# Altium PCB TSAL2_PL.PcbDoc
Units mil, origin at the board's own origin, x right, y up, seen from the top; angles counter-clockwise.
Board outline 3582.68 x 1220.47 mil, 2 copper layers (Top Layer, Bottom Layer); 22 components, 21 nets, 54 pads, 0 vias.
Unrouted connection lines stored in the file: 26.
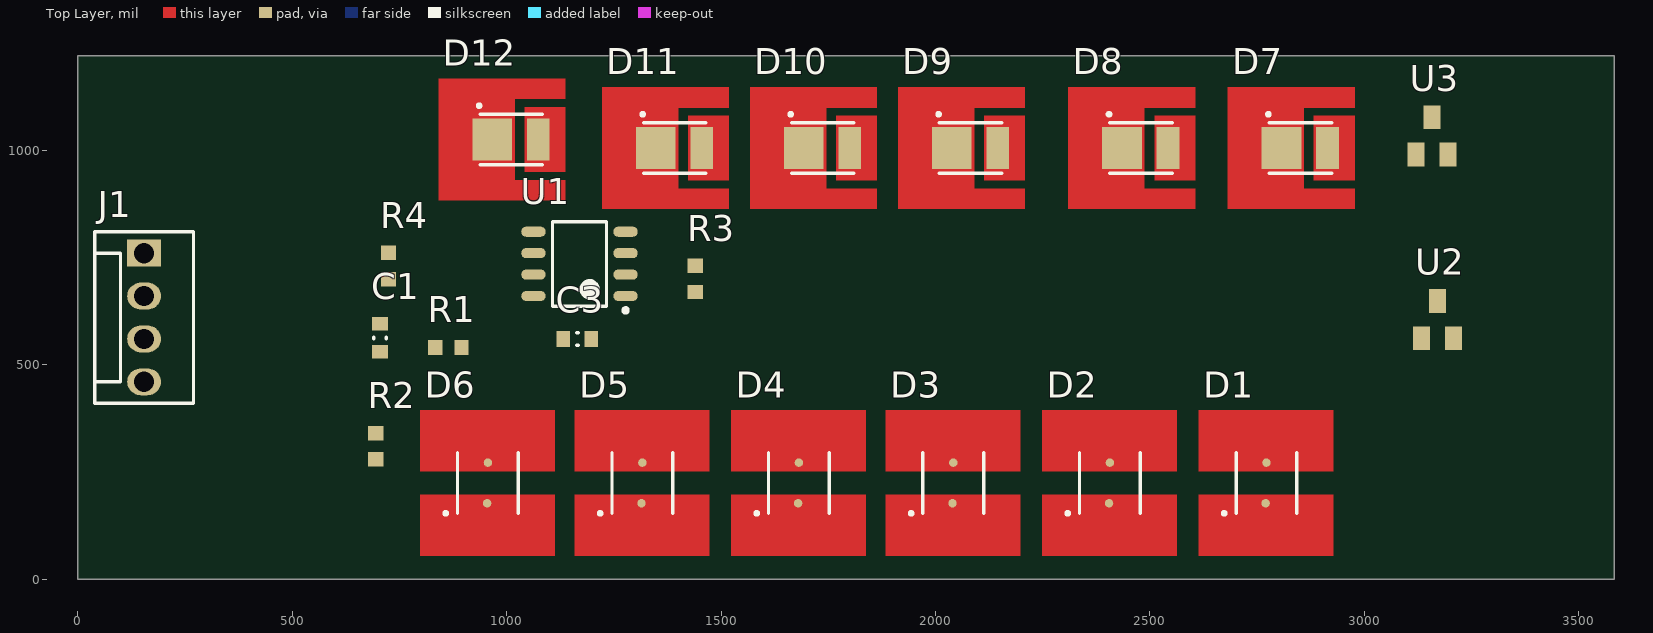
[diagram p0: Top Layer view]
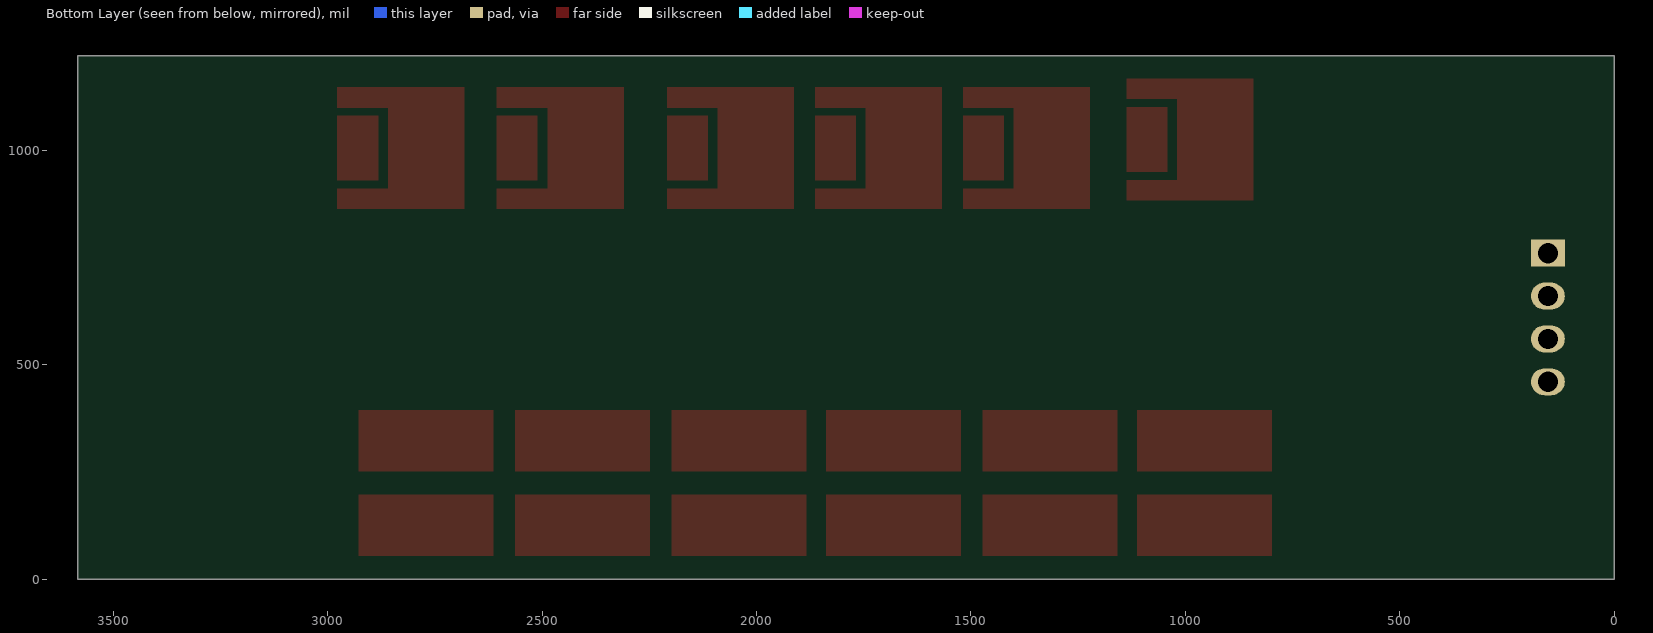
[diagram p1: Bottom Layer view, seen from below]

## Layer stack, top to bottom
Top Solder: solder mask 0.4, Solder Resist, Dk 3.5
Top Layer: signal copper 1.4
Dielectric 1: dielectric 12.6, FR-4, Dk 4.8
Bottom Layer: signal copper 1.4
Bottom Solder: solder mask 0.4, Solder Resist, Dk 3.5

## Board outline
0,0 3582.68,0 3582.68,1220.47 0,1220.47

## Design rules (kind name [scope] priority, off if disabled: settings)
Clearance [All] p1: gap=10 ignorepadtopadclearanceinfootprint=FALSE except(0: Arc-Hole Track-Hole SMDPad-Hole THPad-Hole Via-Hole Fill-Hole Poly-Hole Region-Hole Text-Hole)
PolygonConnect [All] p1: connectstyle=Relief reliefconductorwidth=10 reliefentries=4 polygonreliefangle="90 Angle" airgapwidth=10
RoomDefinition TSAL_PL [InComponentClass('TSAL_PL')] p1: confinementstyle=ConfineIn formatcopy=TRUE lockcomponents=FALSE outline 0,0 2000,0 2000,1000 0,1000
RoutingVias [All] p1: holewidth=28 width=50 viastyle="Through Hole" minholewidth=28 minwidth=50 maxholewidth=28 maxwidth=50
SolderMaskExpansion [All] p1: expansion=4 istentingtop=FALSE
Width [All] p1: maxlimit=10 minlimit=10 preferedwidth=10
30 further rules are at their usual default settings.

## Components (designator, comment, footprint, x,y, rotation, side; value= is the part's Value field where it differs from the comment)
C1 "0603" "0603 CAPACITOR (TDK C-SERIES)" 705,562.52 r90 top
C3 "0603" "0603 CAPACITOR (TDK C-SERIES)" 1165,560 r180 top
D1 "RED" "RED LED" 2771.57,224.29 r180 top
D2 "RED" "RED LED" 2406.57,224.29 r180 top
D3 "RED" "RED LED" 2041.57,224.29 r180 top
D4 "RED" "RED LED" 1681.57,224.29 r180 top
D5 "RED" "RED LED" 1316.57,224.29 r180 top
D6 "RED" "RED LED" 956.57,224.29 r180 top
D7 "GREEN" "GREEN LED" 2815.43,1005 r180 top
D8 "GREEN" "GREEN LED" 2443.86,1005 r180 top
D9 "GREEN" "GREEN LED" 2046.57,1005 r180 top
D10 "GREEN" "GREEN LED" 1701.57,1005 r180 top
D11 "GREEN" "GREEN LED" 1356.57,1005 r180 top
D12 "GREEN" "GREEN LED" 975.43,1025 r180 top
J1 "1x4 Header" HDR1x4 155,610 r0 top
R1 "0603" "0603 RESISTOR (YAGEO)" 864.49,540 r180 top
R2 "0603" "0603 RESISTOR (YAGEO)" 695,310 r90 top
R3 "0603" "0603 RESISTOR (YAGEO)" 1440,700 r90 top
R4 "0603" "0603 RESISTOR (YAGEO)" 725,730 r270 top
U1 "555" SOIC-8 1170,735 r180 top
U2 "2N7002" 2N7002 3170,605 r0 top
U3 "2N7002" 2N7002 3157.6,1033.31 r0 top

## Footprints (in the part's own frame and the unit in brackets; to place one, negate y for a bottom-side part, rotate by r counter-clockwise, add the part's x,y. Pads: shape width x height; smd on the part's side, far side on the other; paste and mask are expansions set on the pad)
2N7002 [mm]
  rect 1x1.4 smd: 1(-0.95,-1.1) 2(0.95,-1.1) 3(0,1.1)
  body extent -1.46,-1.4 1.46,1.4, height 1.16
"0603 CAPACITOR (TDK C-SERIES)" [mm] "Chip Capacitor, 2-Leads, Body 1.60x0.80mm, IPC Medium Density"
  rect 0.8x0.95 smd: 1(-0.825,0) 2(0.825,0)
  silkscreen extent -0.05,-0.38 0.05,0.38, body extent -0.85,-0.45 0.85,0.45, height 0.9
"0603 RESISTOR (YAGEO)" [mm] "Chip Resistor, 2-Leads, Body 1.60x0.80mm, IPC Medium Density"
  rect 0.85x0.9 smd: 1(-0.775,0) 2(0.775,0)
  body extent -0.85,-0.45 0.85,0.45, height 0.55
"GREEN LED" [mm]
  rect 1.35x2.5 smd: 1(-2.5,0)
  rect 2.35x2.5 smd: 2(0.225,0)
  Top Layer region: -4.1,-3.6 -4.1,-2.4 -1.1,-2.4 -1.1,-1.25 -1.1,1.25 -1.1,2.4 -4.1,2.4 -4.1,3.6 3.4,3.6 3.4,-3.6
  Top Layer region: -4.1,-1.9 -1.7,-1.9 -1.7,-1.25 -1.7,1.25 -1.7,1.9 -4.1,1.9
  silkscreen extent -2.75,-2.07 1.07,1.5, body extent -2.65,-1.35 0.85,1.45, height 0.81
HDR1x4 [mm]
  rect 2x1.6 hole 1.2: 1(0,3.81)
  oval 2x1.6 hole 1.2: 2(0,1.27) 3(0,-1.27) 4(0,-3.81)
  silkscreen extent -2.92,-5.08 2.92,5.08, body extent -2.9,-5.08 2.9,5.08, height 11.07
"RED LED" [mm]
  round 0.5 smd: 1(0.05,1.2) 2(0,-1.2)
  Top Layer region: -1.4,0.7 -1.4,1.7 -0.5,1.7 -0.5,2.5 0.5,2.5 0.5,1.7 1.4,1.7 1.4,0.7
  Top Layer region: -1.4,-0.7 -1.4,-1.7 -0.5,-1.7 -0.5,-2.5 0.5,-2.5 0.5,-1.7 1.4,-1.7 1.4,-0.7
  Top Layer region: 4,-0.7 4,-4.3 -3.95,-4.3 -3.95,-0.7
  Top Layer region: 4,0.7 4,4.3 -3.95,4.3 -3.95,0.7
  silkscreen extent -1.8,-1.8 2.57,1.87, body extent -1.8,-1.86 1.7,1.76, height 1.26
SOIC-8 [mm] "SOIC, 8-Leads, Body 4.91x3.90mm, Pitch 1.27mm, IPC Medium Density"
  oval 1.45x0.6 smd: 1(-2.725,1.905) 2(-2.725,0.635) 3(-2.725,-0.635) 4(-2.725,-1.905) 5(2.725,-1.905) 6(2.725,-0.635) 7(2.725,0.635) 8(2.725,1.905)
  silkscreen extent -2.85,-2.5 1.6,2.88, body extent -3,-2.5 3,2.5, height 1.75

## Part data
C1: library part CL10B103KB8NNNC, "Cap Ceramic 0.01uF 50VDC X7R 10% SMD 0603 Paper T/R", Capacitance=10nF, Case Code (Metric)=1608, Dielectric=X7R, Manufacturer=Samsung, Max Operating Temperature=125°C, Min Operating Temperature=-55°C, Package Quantity=1, Supplier Part Number 1=1276-1009-1-ND, Tolerance=10%, Voltage=50V, Case Code (Imperial)=0603, Case/Package=0603, Category="Ceramic Capacitors", ComponentLink1Description=https://datasheet.ciiva.com/15195/getdatasheetpartid-357415-15195721.pdf?src-supplier=Verical, ComponentLink1URL=https://datasheet.ciiva.com/15195/getdatasheetpartid-357415-15195721.pdf?src-supplier=Verical, ComponentLink2Description=https://datasheet.ciiva.com/29198/457455-da-01-en-vs-kondensator-0603-29198644.pdf?src-supplier=Conrad, ComponentLink2URL=https://datasheet.ciiva.com/29198/457455-da-01-en-vs-kondensator-0603-29198644.pdf?src-supplier=Conrad, ComponentLink3Description=https://datasheet.ciiva.com/20173/71-0315-20173334.pdf?src-supplier=Rapid+Electronics, ComponentLink3URL=https://datasheet.ciiva.com/20173/71-0315-20173334.pdf?src-supplier=Rapid+Electronics, Contact Plating=Tin, Depth=0.8mm, Height=0.8mm, Lead Free="Lead Free", Length=1.6mm, Manufacturer Part Number=CL10B103KB8NNNC, Material=Ceramic, Mount="Surface Mount", Packaging="Tape and Reel", Pricing 1="1=0.10000, 10=0.02700, 50=0.01480, 100=0.01210, 500=0.00866, 1000=0.00681 (USD)", Radiation Hardening=No, RoHS=Yes, Stock 1=3003971, Supplier 1=Digi-Key, Thickness=0.035inch, Voltage Rating=50V, Voltage Rating (DC)=50V, Width=0.031inch
C3: library part UMK107ABJ105KAHT, "CAP ,MLCC ,0603,50V ,X5R,1uF 10% ,T&R", Capacitance=1uF, Case Code (Metric)=1608, Dielectric=X5R, Manufacturer="Taiyo Yuden", Max Operating Temperature=85°C, Min Operating Temperature=-55°C, Package Quantity=4000, Ratings=AEC-Q200, Supplier Part Number 1=587-3501-1-ND, Tolerance=10%, Voltage Rating=50V, Case Code (Imperial)=0603, Case/Package=0603, Category="Ceramic Capacitors", ComponentLink1Description=https://datasheet.ciiva.com/18697/mlcc01-hq-e-18697528.pdf?src-supplier=Digi-Key, ComponentLink1URL=https://datasheet.ciiva.com/18697/mlcc01-hq-e-18697528.pdf?src-supplier=Digi-Key, ComponentLink2Description=https://datasheet.ciiva.com/18697/mlcc01-hq-e-18697529.pdf?src-supplier=Digi-Key, ComponentLink2URL=https://datasheet.ciiva.com/18697/mlcc01-hq-e-18697529.pdf?src-supplier=Digi-Key, ComponentLink3Description=https://datasheet.ciiva.com/18697/mlcc01-hq-e-18697530.pdf?src-supplier=Digi-Key, ComponentLink3URL=https://datasheet.ciiva.com/18697/mlcc01-hq-e-18697530.pdf?src-supplier=Digi-Key, Halogen Free="Halogen Free", Height=0.8mm, Lead Free="Lead Free", Length=0.063inch, Manufacturer Part Number=UMK107ABJ105KAHT, Mount="Surface Mount", Packaging="Tape and Reel", Pricing 1="1=0.18000, 10=0.12600, 50=0.07560, 100=0.06380, 500=0.04368, 1000=0.03864 (USD)", RoHS=Yes, Stock 1=36801, Supplier 1=Digi-Key, Termination=SMD/SMT, Thickness=0.035inch, Voltage Rating (DC)=50V, Width=0.8mm
D1 D2 D3 D4 D5 D6: library part OVS5MRBCR4, "LED 0.33W RED WTR CLR 3.5MM", Case/Package=SMD/SMT, Color=Red, Forward Current=200mA, Forward Voltage=2.2V, Manufacturer="TT Optek", Max Operating Temperature=100°C, Max Power Dissipation=330mW, Min Operating Temperature=-40°C, Package Quantity=1, Power Dissipation=750mW, Power Rating=500mW, Reverse Voltage=12V, Supplier Part Number 1=365-1546-1-ND, Test Current=150mA, Category=LEDs, ComponentLink1Description=https://datasheet.ciiva.com/2126/ovs5mabcr4-2126832.pdf?src-supplier=Digi-Key, ComponentLink1URL=https://datasheet.ciiva.com/2126/ovs5mabcr4-2126832.pdf?src-supplier=Digi-Key, ComponentLink2Description=https://datasheet.ciiva.com/16224/ovs5mrbcr4-16224208.pdf?src-supplier=Future+Electronics, ComponentLink2URL=https://datasheet.ciiva.com/16224/ovs5mrbcr4-16224208.pdf?src-supplier=Future+Electronics, ComponentLink3Description=https://datasheet.ciiva.com/2126/ovs5mabcr4-2126833.pdf?src-supplier=Digi-Key, ComponentLink3URL=https://datasheet.ciiva.com/2126/ovs5mabcr4-2126833.pdf?src-supplier=Digi-Key, ComponentLink4Description=https://datasheet.ciiva.com/46403/ovs5mabcr4-46403613.pdf?src-supplier=Element14, ComponentLink4URL=https://datasheet.ciiva.com/46403/ovs5mabcr4-46403613.pdf?src-supplier=Element14, ComponentLink5Description=https://datasheet.ciiva.com/2126/ovs5mabcr4-2126831.pdf?src-supplier=Digi-Key, ComponentLink5URL=https://datasheet.ciiva.com/2126/ovs5mabcr4-2126831.pdf?src-supplier=Digi-Key, Depth=3.5mm, Dominant Wavelength=625nm, Illumination Color=Red, Lead Free="Lead Free", Length=3.5mm, Lens Style=Clear,Diffused,Colorless, Luminous Intensity=7150mcd, Manufacturer Part Number=OVS5MRBCR4, Max Current Rating=200mA, Mount="Surface Mount", Number of Elements=1, Number of Pins=2, Packaging="Tape and Reel", Pricing 1="1=0.96000, 100=0.92400, 250=0.88000, 500=0.85800 (USD)", REACH SVHC="No SVHC", RoHS=Yes, Stock 1=10132, Supplier 1=Digi-Key, Viewing Angle=120°, Wavelength=625nm
D7 D8 D9 D10 D11 D12: library part XZDG25X109FS, "Led 3.5X2.8 0.5W SMD Green", Case Code (Imperial)=1411, Case Code (Metric)=3528, Color=Green, Forward Voltage=3.5V, Lens Color=Colorless, Manufacturer=SunLED, Supplier Part Number 1=1497-1345-1-ND, Test Current=150mA, Case/Package=1411, Category=LEDs, ComponentLink1Description=http://www.sunledusa.com/products/spec/XZDG25X109FS.pdf?src-supplier=Digi-Key, ComponentLink1URL=http://www.sunledusa.com/products/spec/XZDG25X109FS.pdf?src-supplier=Digi-Key, ComponentLink2Description=https://www.sunledusa.com/products/spec/XZDG25X109FS.pdf?src-supplier=Digi-Key, ComponentLink2URL=https://www.sunledusa.com/products/spec/XZDG25X109FS.pdf?src-supplier=Digi-Key, Dominant Wavelength=525nm, Height=1.05mm, Length=3.5mm, Lens Size=2.5mm, Lens Style=Round,Flat, Lens Transparency=Clear, Luminous Intensity=6990mcd, Manufacturer Part Number=XZDG25X109FS, Mount="Surface Mount", Packaging="Cut Tape", Pricing 1="1=1.83000, 10=1.61300, 100=0.93630, 500=0.84640, 1000=0.72738 (USD)", RoHS=No, Stock 1=1496, Supplier 1=Digi-Key, Viewing Angle=120°, Width=2.8mm
J1: library part 22-27-2041, "Conn Wire to Board HDR 4 POS 2.54mm Solder ST Thru-Hole Bag", Color=Natural, Contact Resistance=10mR, Housing Color=White, Manufacturer=Molex, Max Operating Temperature=75°C, Min Operating Temperature=0°C, Supplier Part Number 1=WM4113-ND, Category="Headers and Wire Housings", ComponentLink1Description=https://datasheet.ciiva.com/6813/022272021-sd-6813678.pdf?src-supplier=Digi-Key, ComponentLink1URL=https://datasheet.ciiva.com/6813/022272021-sd-6813678.pdf?src-supplier=Digi-Key, ComponentLink2Description=https://datasheet.ciiva.com/7844/1625756-7844114.pdf?src-supplier=Element14, ComponentLink2URL=https://datasheet.ciiva.com/7844/1625756-7844114.pdf?src-supplier=Element14, ComponentLink3Description=https://datasheet.ciiva.com/11746/0900766b80462714-11746241.pdf?src-supplier=RSComponents, ComponentLink3URL=https://datasheet.ciiva.com/11746/0900766b80462714-11746241.pdf?src-supplier=RSComponents, ComponentLink4Description=https://datasheet.ciiva.com/20207/22-0838e-20207115.pdf?src-supplier=Rapid+Electronics, ComponentLink4URL=https://datasheet.ciiva.com/20207/22-0838e-20207115.pdf?src-supplier=Rapid+Electronics, ComponentLink5Description=https://datasheet.ciiva.com/15217/getdatasheetpartid-176661-15217685.pdf?src-supplier=Verical, ComponentLink5URL=https://datasheet.ciiva.com/15217/getdatasheetpartid-176661-15217685.pdf?src-supplier=Verical, ComponentLink6Description=https://datasheet.ciiva.com/49385/879300-49385686.pdf?src-supplier=Jameco, ComponentLink6URL=https://datasheet.ciiva.com/49385/879300-49385686.pdf?src-supplier=Jameco, Connector Type="Male Pin", Contact Material=Brass, Contact Mating Length=0.295inch, Contact Plating=Tin,Copper, Depth=5.8mm, Fastening Type=Friction, Gender=Male, Housing Material=Nylon, Length=10.16mm, Manufacturer Part Number=22-27-2041, Mount="Through Hole", Number of Contacts=4, Number of Positions=4, Number of Rows=1, Orientation=Straight, Packaging=Bulk, Pitch=2.54mm, Pricing 1="1=0.40000, 10=0.38300, 100=0.26800, 500=0.22974, 1000=0.19145, 5000=0.16410, 10000=0.15316 (USD)", RoHS=Yes, Stock 1=5089, Supplier 1=Digi-Key, Termination=Solder
R1: library part CRCW060322K0FKEAC, "Res Thick Film 0603 22K Ohm 1% 1/10W ±100ppm/°C Molded SMD Paper T/R", Case/Package=Molded, Manufacturer="Vishay Semiconductors", Max Operating Temperature=155°C, Min Operating Temperature=-55°C, Power Rating=100mW, Resistance=22k, Resistor Type="Thick Film", Supplier Part Number 1=541-4036-1-ND, Temperature Coefficient=100ppm/°C, Tolerance=1%, Category=Resistors, ComponentLink1Description=http://www.vishay.com/docs/28773/crcwce3.pdf?src-supplier=Digi-Key, ComponentLink1URL=http://www.vishay.com/docs/28773/crcwce3.pdf?src-supplier=Digi-Key, ComponentLink2Description=http://www.vishay.com/docs/20035/dcrcwe3.pdf?src-supplier=Avnet+Asia, ComponentLink2URL=http://www.vishay.com/docs/20035/dcrcwe3.pdf?src-supplier=Avnet+Asia, Contact Plating=Tin, Lead Free="Lead Free", Length=1.55mm, Manufacturer Part Number=CRCW060322K0FKEAC, Mount="Surface Mount", Pricing 1="1=0.10000, 10=0.03100, 100=0.01260, 1000=0.00567, 2500=0.00492 (USD)", RoHS=Yes, Stock 1=48223, Supplier 1=Digi-Key, Termination=Wraparound
R2: library part RC0603FR-0753R6L, "RES SMD 53.6 OHM 1% 1/10W 0603", Case Code (Metric)=1608, Manufacturer=Yageo, Max Operating Temperature=155°C, Min Operating Temperature=-55°C, Power Rating=100mW, Resistance=53.6, Resistor Type="Thick Film", Supplier Part Number 1=311-53.6HRCT-ND, Temperature Coefficient=100ppm/°C, Tolerance=1%, Voltage Rating=50V, Case Code (Imperial)=0603, Case/Package=0603, Category="Chip SMD Resistors", ComponentLink1Description=http://www.mouser.com/ds/2/447/RC0603-272842.pdf?src-supplier=Mouser, ComponentLink1URL=http://www.mouser.com/ds/2/447/RC0603-272842.pdf?src-supplier=Mouser, ComponentLink2Description=http://components.arrow.com/part/dataview/0323_03540904?src-supplier=Arrow+Europe, ComponentLink2URL=http://components.arrow.com/part/dataview/0323_03540904?src-supplier=Arrow+Europe, ComponentLink3Description=http://www.yageo.com/documents/recent/PYu-RC_Group_51_RoHS_L_9.pdf?src-supplier=Digi-Key, ComponentLink3URL=http://www.yageo.com/documents/recent/PYu-RC_Group_51_RoHS_L_9.pdf?src-supplier=Digi-Key, ComponentLink4Description=http://www.yageo.com/documents/recent/PYu-RC_Group_51_RoHS_L_10.pdf?src-supplier=Digi-Key, ComponentLink4URL=http://www.yageo.com/documents/recent/PYu-RC_Group_51_RoHS_L_10.pdf?src-supplier=Digi-Key, ComponentLink5Description=http://www.yageo.com/documents/recent/PYu-RC0603_51_RoHS_L_7.pdf?src-supplier=Future+Electronics, ComponentLink5URL=http://www.yageo.com/documents/recent/PYu-RC0603_51_RoHS_L_7.pdf?src-supplier=Future+Electronics, Depth=0.8mm, Height=0.45mm, Lead Free="Lead Free", Length=1.6mm, Manufacturer Part Number=RC0603FR-0753R6L, Military Standard=Not, Packaging="Tape and Reel", Pricing 1="1=0.10000, 10=0.02100, 100=0.00850, 1000=0.00382, 2500=0.00331 (USD)", RoHS=Yes, Stock 1=56276, Supplier 1=Digi-Key, Termination=SMD/SMT, Voltage Rating (DC)=50V, Width=0.8mm
R3: library part CRCW0603200KFKEAC, "Res Thick Film 0603 200K Ohm 1% 1/10W ±100ppm/°C Molded SMD Paper T/R", Case/Package=Molded, Manufacturer=Vishay, Max Operating Temperature=155°C, Min Operating Temperature=-55°C, Power Rating=100mW, Resistance=200k, Resistor Type="Thick Film", Supplier Part Number 1=541-4027-1-ND, Temperature Coefficient=100ppm/°C, Tolerance=1%, Category=Resistors, ComponentLink1Description=http://www.vishay.com/docs/28773/crcwce3.pdf?src-supplier=Digi-Key, ComponentLink1URL=http://www.vishay.com/docs/28773/crcwce3.pdf?src-supplier=Digi-Key, Contact Plating=Tin, Lead Free="Lead Free", Length=1.55mm, Manufacturer Part Number=CRCW0603200KFKEAC, Mount="Surface Mount", Pricing 1="1=0.10000, 10=0.03100, 100=0.01260, 1000=0.00567, 2500=0.00492 (USD)", RoHS=Yes, Stock 1=12235, Supplier 1=Digi-Key, Termination=Wraparound
R4: library part RC0603FR-0760R4L, "RES SMD 60.4 OHM 1% 1/10W 0603", Case Code (Metric)=1608, Manufacturer=Yageo, Max Operating Temperature=155°C, Min Operating Temperature=-55°C, Power Rating=100mW, Resistance=60.4, Resistor Type="Thick Film", Supplier Part Number 1=311-60.4HRCT-ND, Temperature Coefficient=100ppm/°C, Tolerance=1%, Voltage Rating=50V, Case Code (Imperial)=0603, Case/Package=0603, Category="Chip SMD Resistors", ComponentLink1Description=https://datasheet.ciiva.com/12558/rc0603-272842-12558933.pdf?src-supplier=Mouser, ComponentLink1URL=https://datasheet.ciiva.com/12558/rc0603-272842-12558933.pdf?src-supplier=Mouser, Depth=0.8mm, Height=0.45mm, Lead Free="Lead Free", Length=1.6mm, Manufacturer Part Number=RC0603FR-0760R4L, Military Standard=Not, Packaging="Tape and Reel", Pricing 1="1=0.10000, 10=0.02100, 100=0.00850, 1000=0.00382, 2500=0.00331 (USD)", RoHS=Yes, Stock 1=1087363, Supplier 1=Digi-Key, Termination=SMD/SMT, Voltage Rating (DC)=50V, Width=0.8mm
U1: library part SA555DRG4, "IC OSC SGL TIMER 100KHZ 8-SOIC", Case/Package=SOIC, Frequency=100kHz, High Level Output Current=-200mA, Low Level Output Current=200mA, Manufacturer="Texas Instruments", Max Operating Temperature=85°C, Max Supply Voltage=16V, Min Operating Temperature=-40°C, Min Supply Voltage=4.5V, Nominal Supply Current=2mA, Operating Supply Current=10mA, Package Quantity=2500, Quiescent Current=15mA, Supplier Part Number 1=296-48948-1-ND, Category="Timers and Oscillators", ComponentLink1Description=https://datasheet.ciiva.com/26943/getdatasheetpartid-624446-26943897.pdf?src-supplier=Verical, ComponentLink1URL=https://datasheet.ciiva.com/26943/getdatasheetpartid-624446-26943897.pdf?src-supplier=Verical, ComponentLink2Description=https://datasheet.ciiva.com/1235/sa555-1235928.pdf?src-supplier=Digi-Key, ComponentLink2URL=https://datasheet.ciiva.com/1235/sa555-1235928.pdf?src-supplier=Digi-Key, ComponentLink3Description=https://datasheet.ciiva.com/14274/se555m-14274518.pdf?src-supplier=Avnet, ComponentLink3URL=https://datasheet.ciiva.com/14274/se555m-14274518.pdf?src-supplier=Avnet, Lead Free="Lead Free", Manufacturer Part Number=SA555DRG4, Mount="Surface Mount", Number of Pins=8, Number of Timers/Counters=1, Packaging="Tape and Reel", Pricing 1="1=0.39000, 10=0.31500, 25=0.28800, 100=0.21440, 250=0.19432, 500=0.16080, 1000=0.12060 (USD)", Radiation Hardening=No, RoHS=Yes, Stock 1=1131, Supplier 1=Digi-Key, Weight=0.002561oz
U2 U3: "ON SEMICONDUCTOR - 2N7002 - MOSFET Transistor, N Channel, 115 mA, 60 V, 1.2 ohm, 10 V, 2.1 V", Case/Package=SOT-23, Continuous Drain Current (ID)=115mA, Drain to Source Breakdown Voltage=60V, Drain to Source Resistance=1.2R, Gate to Source Voltage (Vgs)=20V, Input Capacitance=50pF, Manufacturer="ON Semiconductor / Fairchild", Max Operating Temperature=150°C, Max Power Dissipation=200mW, Min Operating Temperature=-55°C, On-State Resistance=5.3R, Package Quantity=1, Supplier Part Number 1=2N7002NCT-ND, Threshold Voltage=2.1V, Category=MOSFETs, ComponentLink1Description=https://datasheet.ciiva.com/931/2n7000-931777.pdf?src-supplier=Farnell, ComponentLink1URL=https://datasheet.ciiva.com/931/2n7000-931777.pdf?src-supplier=Farnell, ComponentLink2Description=https://datasheet.ciiva.com/1254/2n7002-1254451.pdf?src-supplier=Newark, ComponentLink2URL=https://datasheet.ciiva.com/1254/2n7002-1254451.pdf?src-supplier=Newark, ComponentLink3Description=https://datasheet.ciiva.com/15137/getdatasheetpartid-93547-15137771.pdf?src-supplier=Verical, ComponentLink3URL=https://datasheet.ciiva.com/15137/getdatasheetpartid-93547-15137771.pdf?src-supplier=Verical, ComponentLink4Description=https://datasheet.ciiva.com/27746/47-0120-27746881.pdf?src-supplier=Rapid+Electronics, ComponentLink4URL=https://datasheet.ciiva.com/27746/47-0120-27746881.pdf?src-supplier=Rapid+Electronics, ComponentLink5Description=https://datasheet.ciiva.com/1254/660093-1254452.pdf?src-supplier=Newark, ComponentLink5URL=https://datasheet.ciiva.com/1254/660093-1254452.pdf?src-supplier=Newark, ComponentLink6Description=https://datasheet.ciiva.com/931/2n7000-931762.pdf?src-supplier=Digi-Key, ComponentLink6URL=https://datasheet.ciiva.com/931/2n7000-931762.pdf?src-supplier=Digi-Key, ComponentLink7Description=https://datasheet.ciiva.com/931/2n7000-931763.pdf?src-supplier=Digi-Key, ComponentLink7URL=https://datasheet.ciiva.com/931/2n7000-931763.pdf?src-supplier=Digi-Key, ComponentLink8Description=https://datasheet.ciiva.com/931/2n7000-931764.pdf?src-supplier=Digi-Key, ComponentLink8URL=https://datasheet.ciiva.com/931/2n7000-931764.pdf?src-supplier=Digi-Key, ComponentLink9Description=https://datasheet.ciiva.com/1188/660093-1188359.pdf?src-supplier=Element14, ComponentLink9URL=https://datasheet.ciiva.com/1188/660093-1188359.pdf?src-supplier=Element14, ComponentLink10Description=https://datasheet.ciiva.com/1188/660093-1188361.pdf?src-supplier=Element14, ComponentLink10URL=https://datasheet.ciiva.com/1188/660093-1188361.pdf?src-supplier=Element14, ComponentLink11Description=https://datasheet.ciiva.com/17007/2n7002-17007243.pdf?src-supplier=Future+Electronics, ComponentLink11URL=https://datasheet.ciiva.com/17007/2n7002-17007243.pdf?src-supplier=Future+Electronics, ComponentLink12Description=https://datasheet.ciiva.com/3304/nds7002a-3304381.pdf?src-supplier=Avnet, ComponentLink12URL=https://datasheet.ciiva.com/3304/nds7002a-3304381.pdf?src-supplier=Avnet, ComponentLink13Description=https://datasheet.ciiva.com/22655/660093-22655230.pdf?src-supplier=Element14, ComponentLink13URL=https://datasheet.ciiva.com/22655/660093-22655230.pdf?src-supplier=Element14, Contact Plating=Tin,Matte, Current=115mA, Current Rating=115mA, Drain to Source Voltage (Vdss)=60V, Dual Supply Voltage=60V, Element Configuration=Single, Height=0.93mm, Lead Free="Lead Free", Length=2.92mm, Manufacturer Part Number=2N7002, Mount="Surface Mount", Nominal Vgs=2.1V, Number of Elements=1, Number of Pins=3, Packaging="Tape and Reel", Power Dissipation=200mW, Pricing 1="1=0.32000, 10=0.26300, 25=0.22040, 100=0.10780, 500=0.08992, 1000=0.06248 (USD)", Radiation Hardening=No, Rds On Max=7.5R, REACH SVHC="No SVHC", RoHS=Yes, Stock 1=1092022, Supplier 1=Digi-Key, Voltage=60V, Voltage Rating (DC)=60V, Width=3.05mm

## Nets (pads, with @x,y where several pads share a name; then routed paths per layer and width w, separated by ;. In a path a pad name is that pad's centre, name@x,y a point inside that pad or via, vN(x,y) a via of type N, cw(c..) or ccw(c..) an arc to the next point about the centre after c; other vN are vias at no path point)
+24V: C1.1 J1.2 R1.2 R2.2 R4.2 U1.8
DRAIN: D7.1
GROUND: C1.2 C3.2 J1.4 U1.1
NetC3_1: C3.1 R3.1 U1.2 U1.6
NetD1_1: D1.1
NetD1_2: D1.2 D2.1
NetD2_2: D2.2 D3.1
NetD3_2: D3.2 D4.1
NetD4_2: D4.2 D5.1
NetD5_2: D5.2 D6.1
NetD6_2: D6.2 R2.1
NetD7_2: D7.2 D8.1
NetD8_2: D8.2 D9.1
NetD9_2: D9.2 D10.1
NetD10_2: D10.2 D11.1
NetD11_2: D11.2 D12.1
NetD12_2: D12.2 R4.1
NetJ1_1: J1.1 U1.4
NetJ1_3: J1.3
NetR1_1: R1.1 R3.2 U1.7
NetU1_3: U1.3
pads on no net: U1.5 U2.1 U2.2 U2.3 U3.1 U3.2 U3.3